# Altium PCB digital.PcbDoc (part 1 of 3)
Units mm, origin at the board's own origin, x right, y up, seen from the top; angles counter-clockwise.
Board outline 25.2 x 25.2 mm, 4 copper layers (Top Layer, Inner Layer 1, Inner Layer 2, Bottom Layer), stack 1.51 mm thick; 75 components, 68 nets, 309 pads, 118 vias.
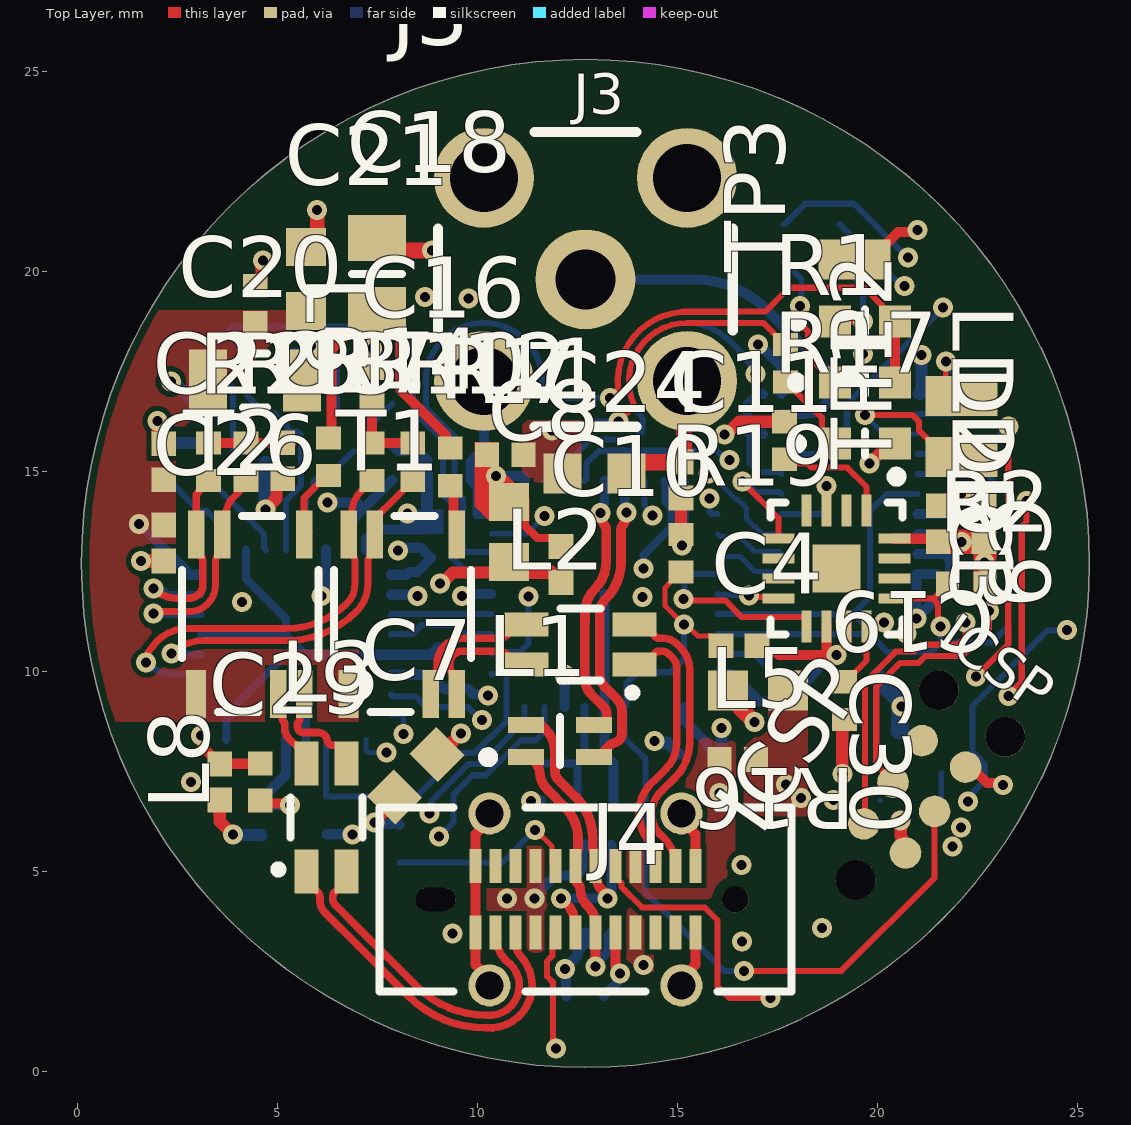
[diagram p0: Top Layer view]
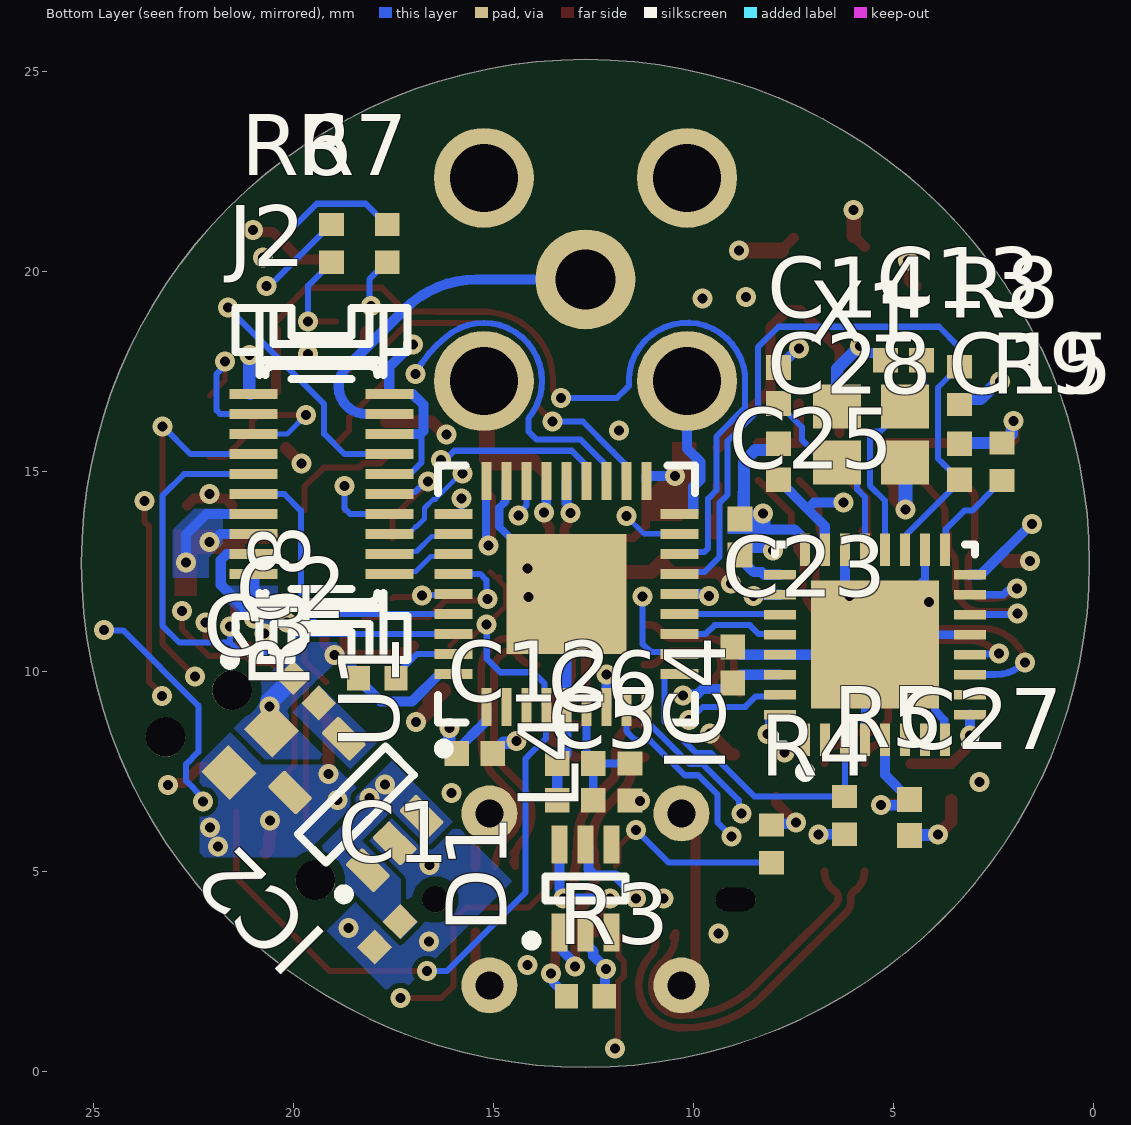
[diagram p1: Bottom Layer view, seen from below]
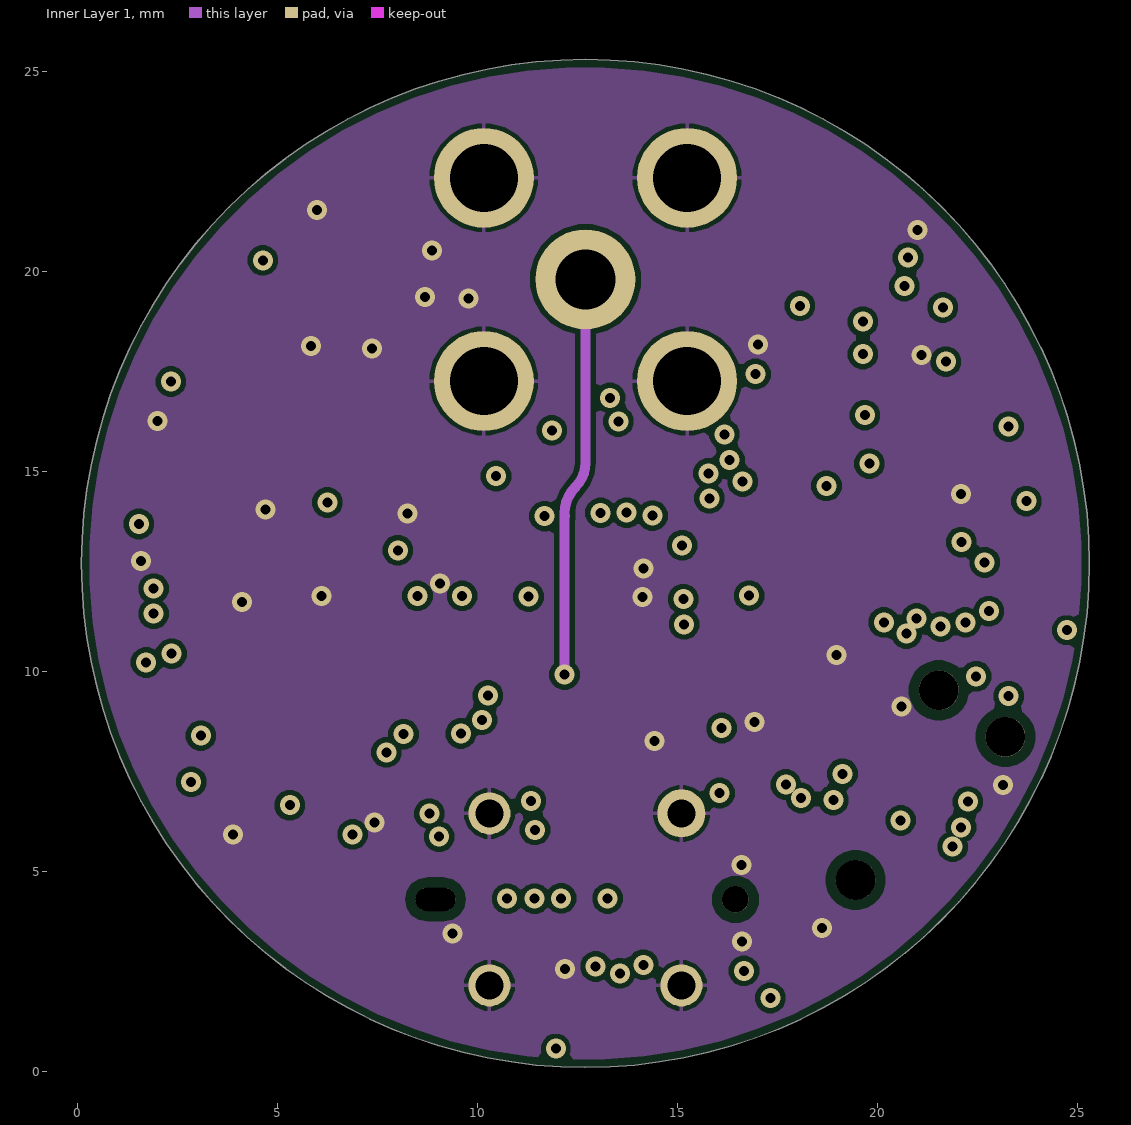
[diagram p2: Inner Layer 1]
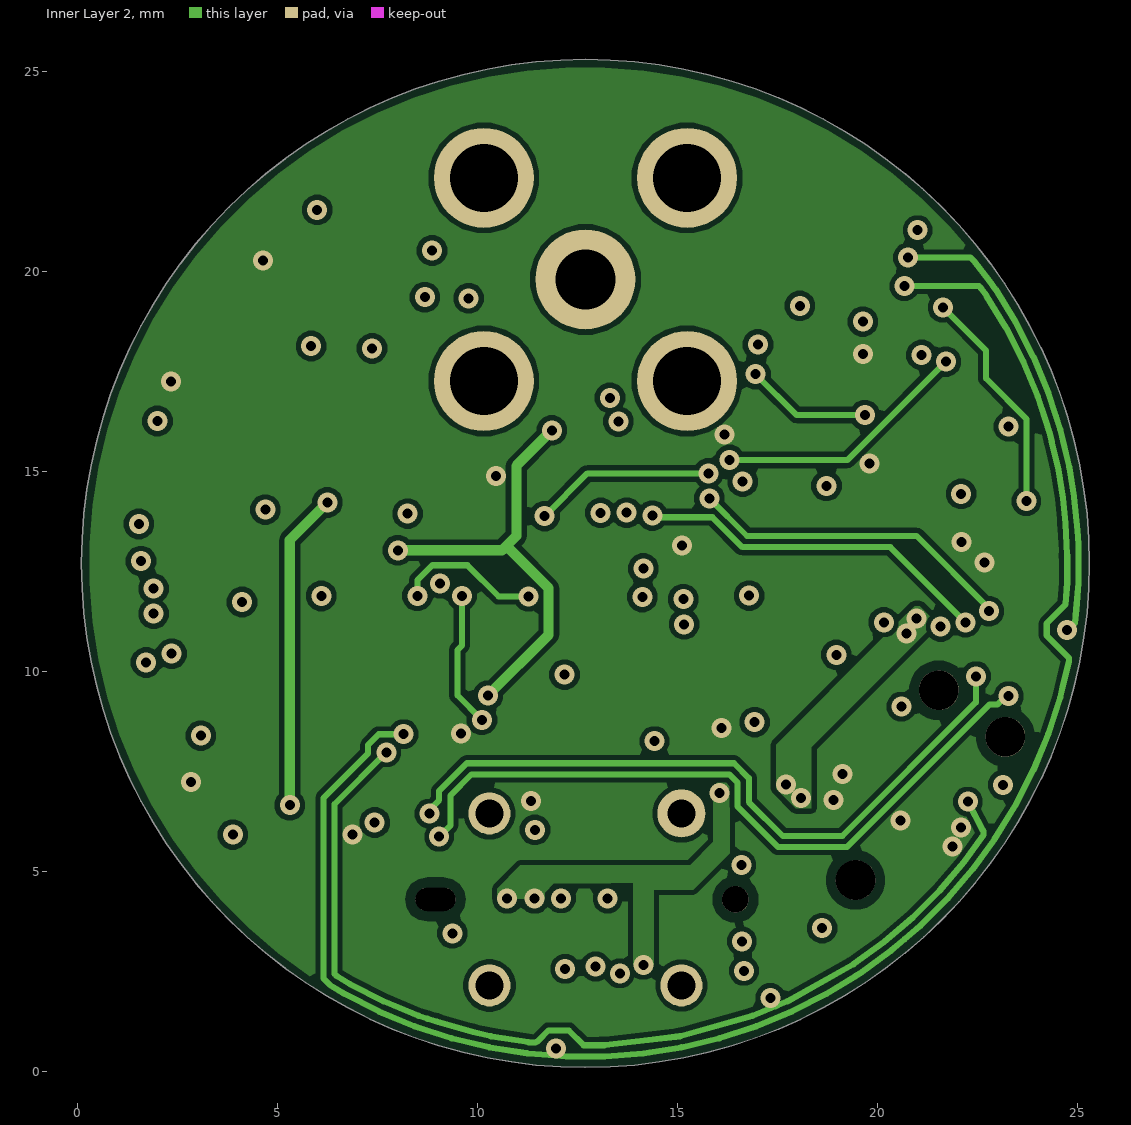
[diagram p3: Inner Layer 2]
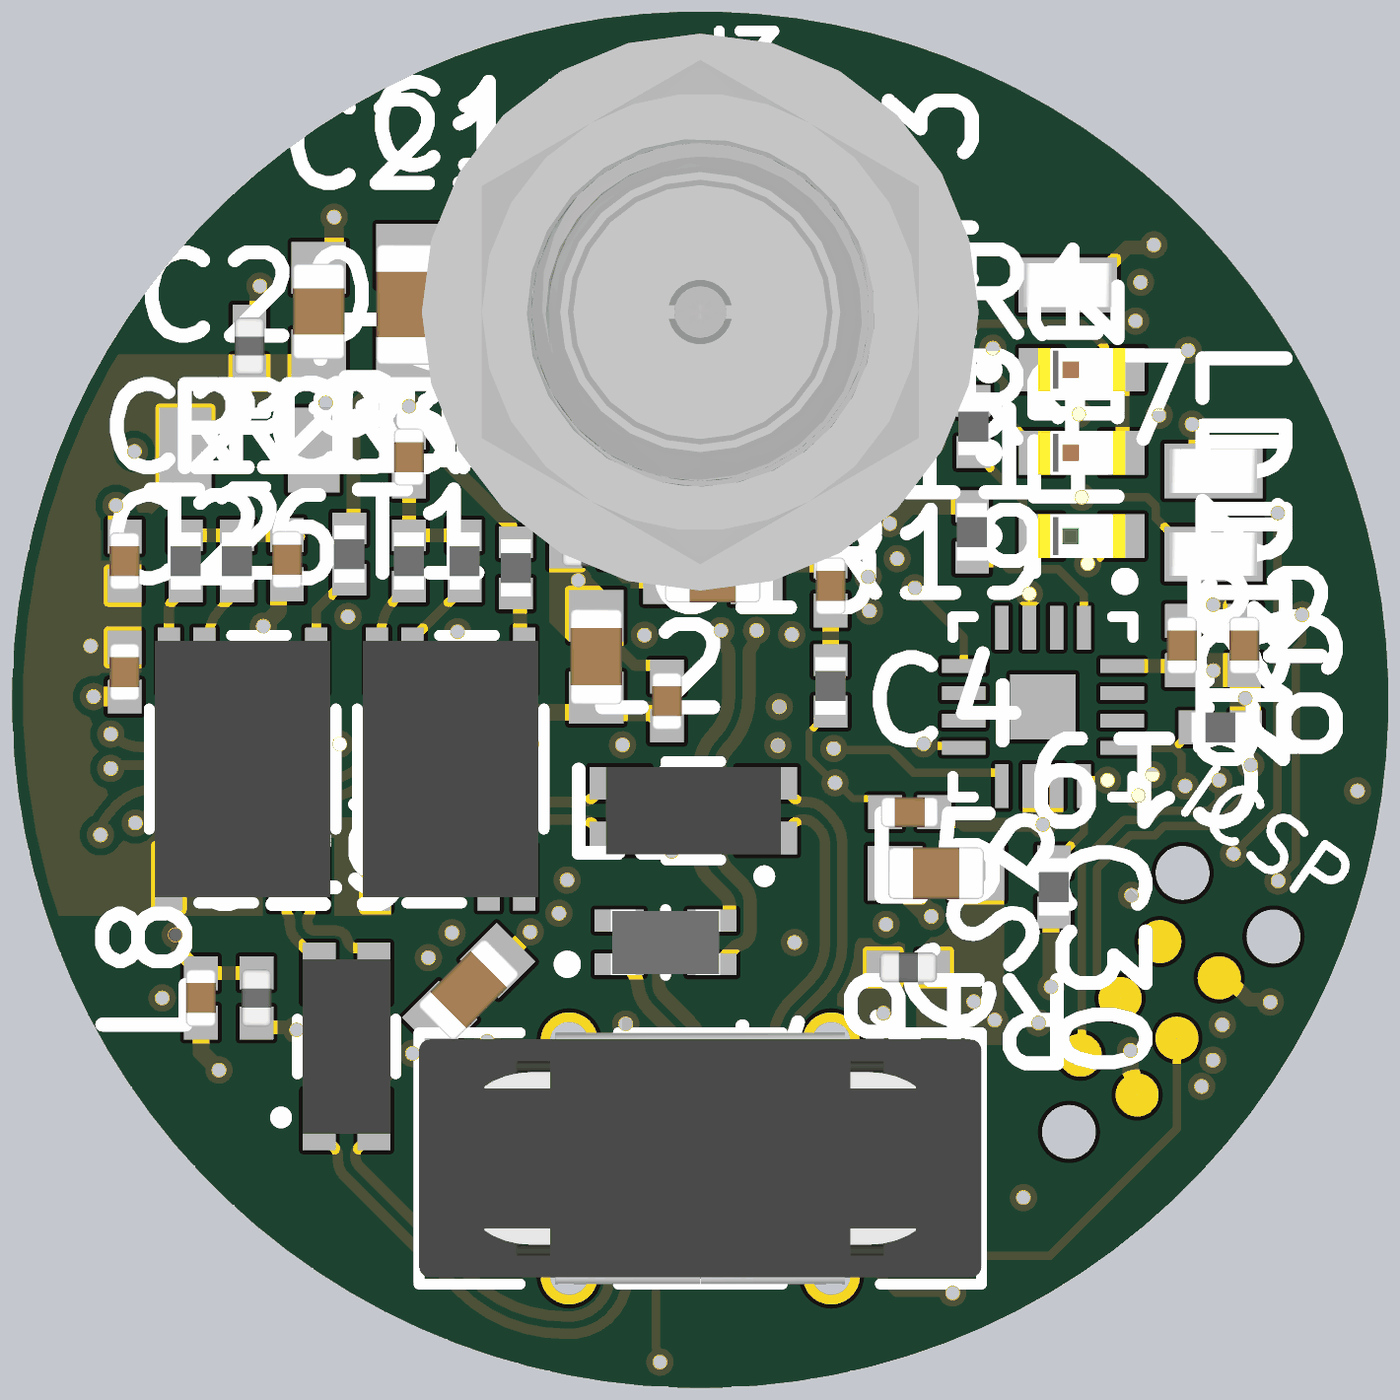
[diagram p5: 3D render of the assembled board from above, using the file's embedded part models]
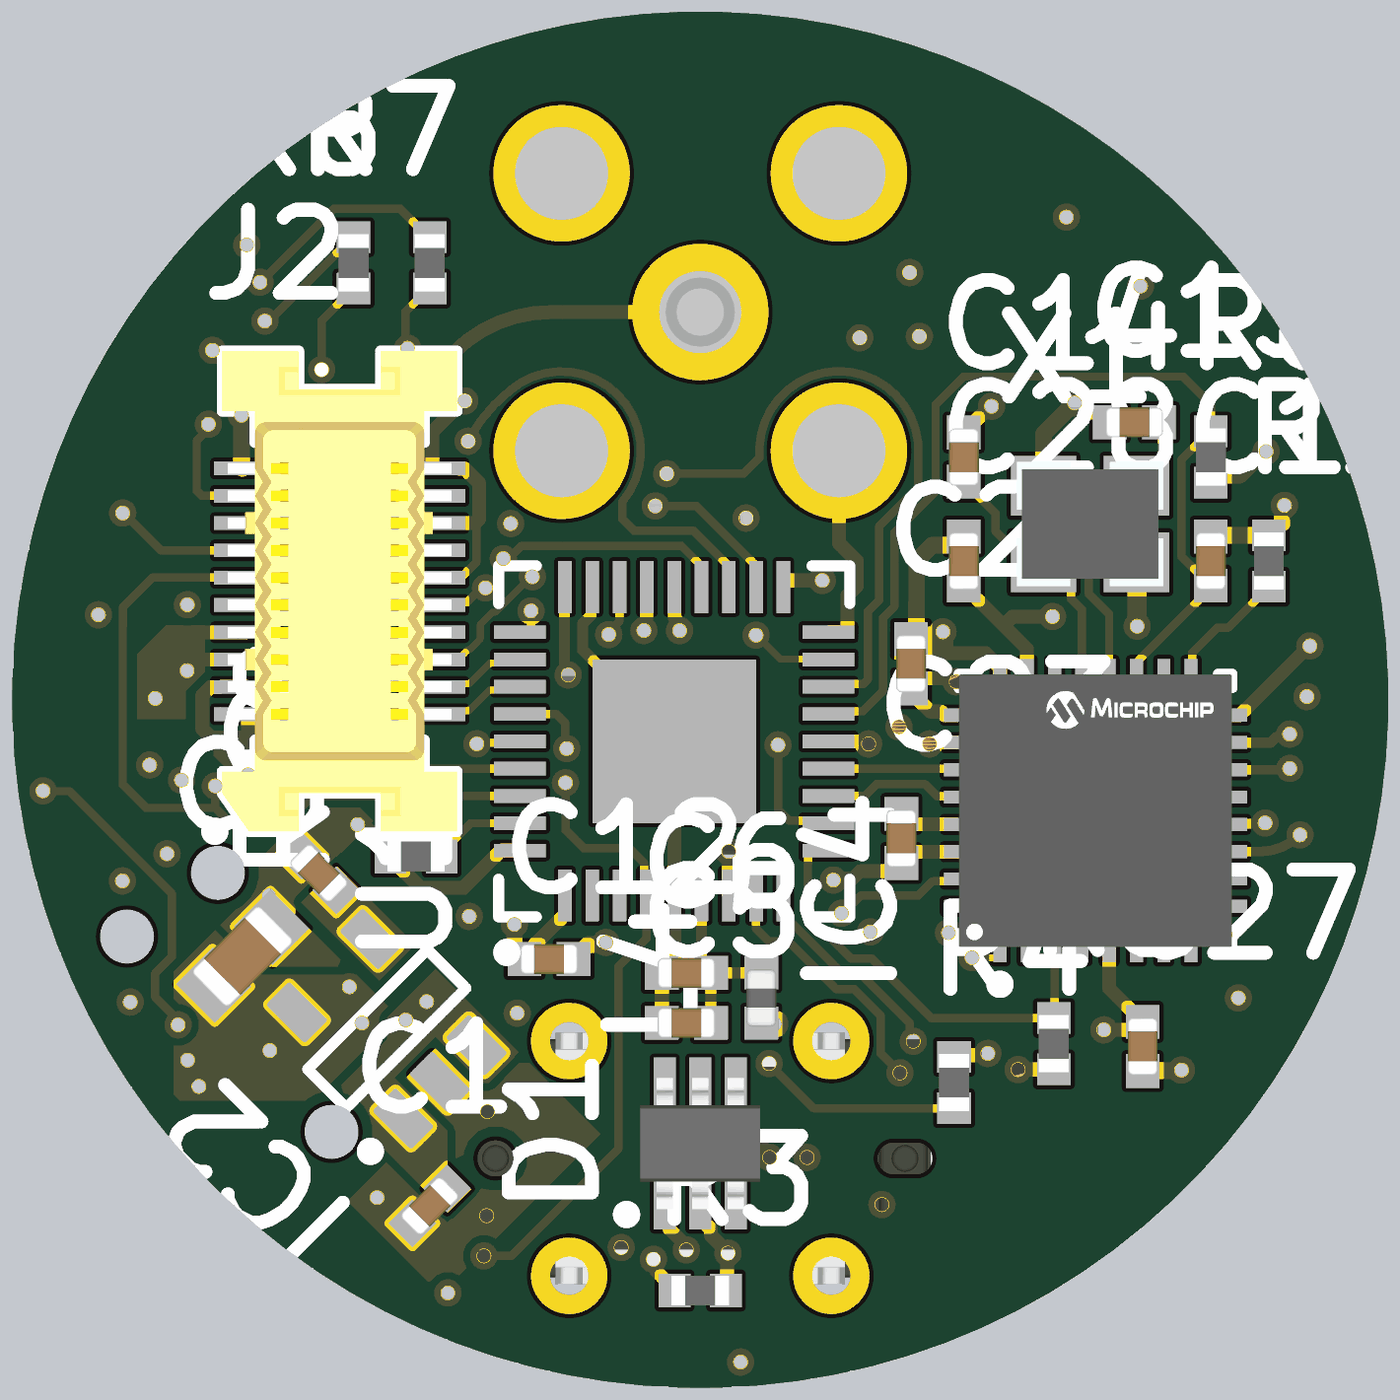
[diagram p6: 3D render of the assembled board from below, using the file's embedded part models]

## Layer stack, top to bottom
Top Solder: solder mask 0.0102, Solder Resist, Dk 3.5
Top Layer: signal copper 0.035
Dielectric 1: prepreg 0.22, PP-006, Dk 4.1
Inner Layer 1: signal copper 0.035
Dielectric 2: dielectric 0.93, FR-4, Dk 4.8
Inner Layer 2: signal copper 0.035
Dielectric 3: prepreg 0.22, PP-006, Dk 4.1
Bottom Layer: signal copper 0.035
Bottom Solder: solder mask 0.0102, Solder Resist, Dk 3.5

## Board outline
12.7,0.1 cw(c12.7,12.7) 0.1,12.7 cw(c12.7,12.7) 12.7,25.3 cw(c12.7,12.7) 25.3,12.7 cw(c12.7,12.7)

## Design rules (kind name [scope] priority, off if disabled: settings)
BoardOutlineClearance [All] p1: gap=0.2 ignorepadtopadclearanceinfootprint=FALSE
Clearance Clearance_ViaInPad [IsPad vs IsVia] p1: gap=0 ignorepadtopadclearanceinfootprint=FALSE except(0.01: SMDPad-Via)
Clearance [All] p2: gap=0.127 ignorepadtopadclearanceinfootprint=FALSE except(0.25: Arc-Hole Track-Hole SMDPad-Hole THPad-Hole Via-Hole Fill-Hole Poly-Hole Region-Hole Text-Hole)
ComponentClearance [All] p1: gap=0.102 collisioncheckmode=3 verticalgap=0.102 showdistances=TRUE
DiffPairsRouting "Schematic Differential Pairs Routing" [InNet('ETHP_RX_P')] p1: maxlimit=0.127 minlimit=0.127 mostfreqgap=0.127 toplayer_minwidth=0.191 toplayer_maxwidth=0.191 toplayer_prefwidth=0.191 midlayer1_minwidth=0.191 midlayer1_maxwidth=0.191 midlayer1_prefwidth=0.191 midlayer2_minwidth=0.191 midlayer2_maxwidth=0.191 midlayer2_prefwidth=0.191 bottomlayer_minwidth=0.191 bottomlayer_maxwidth=0.191 bottomlayer_prefwidth=0.191 maxuncoupledlength=1.778
DiffPairsRouting "Schematic Differential Pairs Routing_2" [InNet('ETHP_TX_N')] p2: maxlimit=0.127 minlimit=0.127 mostfreqgap=0.127 toplayer_minwidth=0.191 toplayer_maxwidth=0.191 toplayer_prefwidth=0.191 midlayer1_minwidth=0.191 midlayer1_maxwidth=0.191 midlayer1_prefwidth=0.191 midlayer2_minwidth=0.191 midlayer2_maxwidth=0.191 midlayer2_prefwidth=0.191 bottomlayer_minwidth=0.191 bottomlayer_maxwidth=0.191 bottomlayer_prefwidth=0.191 maxuncoupledlength=1.778
DiffPairsRouting "Schematic Differential Pairs Routing_45" [InNet('ETH_LED0')] p3: maxlimit=0.152 minlimit=0.127 mostfreqgap=0.127 toplayer_minwidth=0.241 toplayer_maxwidth=0.241 toplayer_prefwidth=0.241 midlayer1_minwidth=0.241 midlayer1_maxwidth=0.241 midlayer1_prefwidth=0.241 midlayer2_minwidth=0.241 midlayer2_maxwidth=0.241 midlayer2_prefwidth=0.241 bottomlayer_minwidth=0.241 bottomlayer_maxwidth=0.241 bottomlayer_prefwidth=0.241 maxuncoupledlength=2.54
DiffPairsRouting "Schematic Differential Pairs Routing_44" [InNet('USBJ_D_N')] p4: maxlimit=0.152 minlimit=0.127 mostfreqgap=0.127 toplayer_minwidth=0.241 toplayer_maxwidth=0.241 toplayer_prefwidth=0.241 midlayer1_minwidth=0.241 midlayer1_maxwidth=0.241 midlayer1_prefwidth=0.241 midlayer2_minwidth=0.241 midlayer2_maxwidth=0.241 midlayer2_prefwidth=0.241 bottomlayer_minwidth=0.241 bottomlayer_maxwidth=0.241 bottomlayer_prefwidth=0.241 maxuncoupledlength=2.54
DiffPairsRouting "Schematic Differential Pairs Routing_43" [InNet('USBJ_D_P')] p5: maxlimit=0.152 minlimit=0.127 mostfreqgap=0.127 toplayer_minwidth=0.241 toplayer_maxwidth=0.241 toplayer_prefwidth=0.241 midlayer1_minwidth=0.241 midlayer1_maxwidth=0.241 midlayer1_prefwidth=0.241 midlayer2_minwidth=0.241 midlayer2_maxwidth=0.241 midlayer2_prefwidth=0.241 bottomlayer_minwidth=0.241 bottomlayer_maxwidth=0.241 bottomlayer_prefwidth=0.241 maxuncoupledlength=2.54
DiffPairsRouting "Schematic Differential Pairs Routing_42" [InNet('ETHJ.RX_P')] p6: maxlimit=0.127 minlimit=0.127 mostfreqgap=0.127 toplayer_minwidth=0.191 toplayer_maxwidth=0.191 toplayer_prefwidth=0.191 midlayer1_minwidth=0.191 midlayer1_maxwidth=0.191 midlayer1_prefwidth=0.191 midlayer2_minwidth=0.191 midlayer2_maxwidth=0.191 midlayer2_prefwidth=0.191 bottomlayer_minwidth=0.191 bottomlayer_maxwidth=0.191 bottomlayer_prefwidth=0.191 maxuncoupledlength=1.778
DiffPairsRouting "Schematic Differential Pairs Routing_41" [InNet('ETHJ.RX_N')] p7: maxlimit=0.127 minlimit=0.127 mostfreqgap=0.127 toplayer_minwidth=0.191 toplayer_maxwidth=0.191 toplayer_prefwidth=0.191 midlayer1_minwidth=0.191 midlayer1_maxwidth=0.191 midlayer1_prefwidth=0.191 midlayer2_minwidth=0.191 midlayer2_maxwidth=0.191 midlayer2_prefwidth=0.191 bottomlayer_minwidth=0.191 bottomlayer_maxwidth=0.191 bottomlayer_prefwidth=0.191 maxuncoupledlength=1.778
DiffPairsRouting "Schematic Differential Pairs Routing_40" [InNet('NetC17_2')] p8: maxlimit=0.127 minlimit=0.127 mostfreqgap=0.127 toplayer_minwidth=0.191 toplayer_maxwidth=0.191 toplayer_prefwidth=0.191 midlayer1_minwidth=0.191 midlayer1_maxwidth=0.191 midlayer1_prefwidth=0.191 midlayer2_minwidth=0.191 midlayer2_maxwidth=0.191 midlayer2_prefwidth=0.191 bottomlayer_minwidth=0.191 bottomlayer_maxwidth=0.191 bottomlayer_prefwidth=0.191 maxuncoupledlength=1.778
DiffPairsRouting "Schematic Differential Pairs Routing_39" [InNet('NetC16_2')] p9: maxlimit=0.127 minlimit=0.127 mostfreqgap=0.127 toplayer_minwidth=0.191 toplayer_maxwidth=0.191 toplayer_prefwidth=0.191 midlayer1_minwidth=0.191 midlayer1_maxwidth=0.191 midlayer1_prefwidth=0.191 midlayer2_minwidth=0.191 midlayer2_maxwidth=0.191 midlayer2_prefwidth=0.191 bottomlayer_minwidth=0.191 bottomlayer_maxwidth=0.191 bottomlayer_prefwidth=0.191 maxuncoupledlength=1.778
DiffPairsRouting "Schematic Differential Pairs Routing_38" [InNet('NetR14_1')] p10: maxlimit=0.127 minlimit=0.127 mostfreqgap=0.127 toplayer_minwidth=0.191 toplayer_maxwidth=0.191 toplayer_prefwidth=0.191 midlayer1_minwidth=0.191 midlayer1_maxwidth=0.191 midlayer1_prefwidth=0.191 midlayer2_minwidth=0.191 midlayer2_maxwidth=0.191 midlayer2_prefwidth=0.191 bottomlayer_minwidth=0.191 bottomlayer_maxwidth=0.191 bottomlayer_prefwidth=0.191 maxuncoupledlength=1.778
DiffPairsRouting "Schematic Differential Pairs Routing_37" [InNet('NetR11_1')] p11: maxlimit=0.127 minlimit=0.127 mostfreqgap=0.127 toplayer_minwidth=0.191 toplayer_maxwidth=0.191 toplayer_prefwidth=0.191 midlayer1_minwidth=0.191 midlayer1_maxwidth=0.191 midlayer1_prefwidth=0.191 midlayer2_minwidth=0.191 midlayer2_maxwidth=0.191 midlayer2_prefwidth=0.191 bottomlayer_minwidth=0.191 bottomlayer_maxwidth=0.191 bottomlayer_prefwidth=0.191 maxuncoupledlength=1.778
DiffPairsRouting "Schematic Differential Pairs Routing_36" [InNet('ETHT_RX_N')] p12: maxlimit=0.127 minlimit=0.127 mostfreqgap=0.127 toplayer_minwidth=0.191 toplayer_maxwidth=0.191 toplayer_prefwidth=0.191 midlayer1_minwidth=0.191 midlayer1_maxwidth=0.191 midlayer1_prefwidth=0.191 midlayer2_minwidth=0.191 midlayer2_maxwidth=0.191 midlayer2_prefwidth=0.191 bottomlayer_minwidth=0.191 bottomlayer_maxwidth=0.191 bottomlayer_prefwidth=0.191 maxuncoupledlength=1.778
DiffPairsRouting "Schematic Differential Pairs Routing_35" [InNet('ETHT_TX_N')] p13: maxlimit=0.127 minlimit=0.127 mostfreqgap=0.127 toplayer_minwidth=0.191 toplayer_maxwidth=0.191 toplayer_prefwidth=0.191 midlayer1_minwidth=0.191 midlayer1_maxwidth=0.191 midlayer1_prefwidth=0.191 midlayer2_minwidth=0.191 midlayer2_maxwidth=0.191 midlayer2_prefwidth=0.191 bottomlayer_minwidth=0.191 bottomlayer_maxwidth=0.191 bottomlayer_prefwidth=0.191 maxuncoupledlength=1.778
DiffPairsRouting "Schematic Differential Pairs Routing_34" [InNet('ETHT_RX_P')] p14: maxlimit=0.127 minlimit=0.127 mostfreqgap=0.127 toplayer_minwidth=0.191 toplayer_maxwidth=0.191 toplayer_prefwidth=0.191 midlayer1_minwidth=0.191 midlayer1_maxwidth=0.191 midlayer1_prefwidth=0.191 midlayer2_minwidth=0.191 midlayer2_maxwidth=0.191 midlayer2_prefwidth=0.191 bottomlayer_minwidth=0.191 bottomlayer_maxwidth=0.191 bottomlayer_prefwidth=0.191 maxuncoupledlength=1.778
DiffPairsRouting "Schematic Differential Pairs Routing_33" [InNet('ETHT_TX_P')] p15: maxlimit=0.127 minlimit=0.127 mostfreqgap=0.127 toplayer_minwidth=0.191 toplayer_maxwidth=0.191 toplayer_prefwidth=0.191 midlayer1_minwidth=0.191 midlayer1_maxwidth=0.191 midlayer1_prefwidth=0.191 midlayer2_minwidth=0.191 midlayer2_maxwidth=0.191 midlayer2_prefwidth=0.191 bottomlayer_minwidth=0.191 bottomlayer_maxwidth=0.191 bottomlayer_prefwidth=0.191 maxuncoupledlength=1.778
DiffPairsRouting "Schematic Differential Pairs Routing_32" [InNet('GND')] p16: maxlimit=0.127 minlimit=0.127 mostfreqgap=0.127 toplayer_minwidth=0.191 toplayer_maxwidth=0.191 toplayer_prefwidth=0.191 midlayer1_minwidth=0.191 midlayer1_maxwidth=0.191 midlayer1_prefwidth=0.191 midlayer2_minwidth=0.191 midlayer2_maxwidth=0.191 midlayer2_prefwidth=0.191 bottomlayer_minwidth=0.191 bottomlayer_maxwidth=0.191 bottomlayer_prefwidth=0.191 maxuncoupledlength=1.778
DiffPairsRouting "Schematic Differential Pairs Routing_31" [InNet('PPA3V3')] p17: maxlimit=0.127 minlimit=0.127 mostfreqgap=0.127 toplayer_minwidth=0.191 toplayer_maxwidth=0.191 toplayer_prefwidth=0.191 midlayer1_minwidth=0.191 midlayer1_maxwidth=0.191 midlayer1_prefwidth=0.191 midlayer2_minwidth=0.191 midlayer2_maxwidth=0.191 midlayer2_prefwidth=0.191 bottomlayer_minwidth=0.191 bottomlayer_maxwidth=0.191 bottomlayer_prefwidth=0.191 maxuncoupledlength=1.778
DiffPairsRouting "Schematic Differential Pairs Routing_30" [InNet('ETHJ.TX_P')] p18: maxlimit=0.127 minlimit=0.127 mostfreqgap=0.127 toplayer_minwidth=0.191 toplayer_maxwidth=0.191 toplayer_prefwidth=0.191 midlayer1_minwidth=0.191 midlayer1_maxwidth=0.191 midlayer1_prefwidth=0.191 midlayer2_minwidth=0.191 midlayer2_maxwidth=0.191 midlayer2_prefwidth=0.191 bottomlayer_minwidth=0.191 bottomlayer_maxwidth=0.191 bottomlayer_prefwidth=0.191 maxuncoupledlength=1.778
DiffPairsRouting "Schematic Differential Pairs Routing_29" [InNet('ETHJ.TX_N')] p19: maxlimit=0.127 minlimit=0.127 mostfreqgap=0.127 toplayer_minwidth=0.191 toplayer_maxwidth=0.191 toplayer_prefwidth=0.191 midlayer1_minwidth=0.191 midlayer1_maxwidth=0.191 midlayer1_prefwidth=0.191 midlayer2_minwidth=0.191 midlayer2_maxwidth=0.191 midlayer2_prefwidth=0.191 bottomlayer_minwidth=0.191 bottomlayer_maxwidth=0.191 bottomlayer_prefwidth=0.191 maxuncoupledlength=1.778
DiffPairsRouting "Schematic Differential Pairs Routing_26" [InNet('NetU1_31')] p20: maxlimit=0.152 minlimit=0.152 mostfreqgap=0.152 toplayer_minwidth=0.229 toplayer_maxwidth=0.229 toplayer_prefwidth=0.229 midlayer1_minwidth=0.229 midlayer1_maxwidth=0.229 midlayer1_prefwidth=0.229 midlayer2_minwidth=0.229 midlayer2_maxwidth=0.229 midlayer2_prefwidth=0.229 bottomlayer_minwidth=0.229 bottomlayer_maxwidth=0.229 bottomlayer_prefwidth=0.229 maxuncoupledlength=2.54
DiffPairsRouting "Schematic Differential Pairs Routing_19" [InNet('USBM_D_N')] p21: maxlimit=0.152 minlimit=0.127 mostfreqgap=0.127 toplayer_minwidth=0.241 toplayer_maxwidth=0.241 toplayer_prefwidth=0.241 midlayer1_minwidth=0.241 midlayer1_maxwidth=0.241 midlayer1_prefwidth=0.241 midlayer2_minwidth=0.241 midlayer2_maxwidth=0.241 midlayer2_prefwidth=0.241 bottomlayer_minwidth=0.241 bottomlayer_maxwidth=0.241 bottomlayer_prefwidth=0.241 maxuncoupledlength=2.54
DiffPairsRouting "Schematic Differential Pairs Routing_17" [InNet('ETHP_TX_P')] p22: maxlimit=0.152 minlimit=0.152 mostfreqgap=0.152 toplayer_minwidth=0.175 toplayer_maxwidth=0.175 toplayer_prefwidth=0.175 midlayer1_minwidth=0.175 midlayer1_maxwidth=0.175 midlayer1_prefwidth=0.175 midlayer2_minwidth=0.175 midlayer2_maxwidth=0.175 midlayer2_prefwidth=0.175 bottomlayer_minwidth=0.175 bottomlayer_maxwidth=0.175 bottomlayer_prefwidth=0.175 maxuncoupledlength=2.54
DiffPairsRouting "Schematic Differential Pairs Routing_16" [InNet('ETHP_RX_P')] p23: maxlimit=0.152 minlimit=0.152 mostfreqgap=0.152 toplayer_minwidth=0.175 toplayer_maxwidth=0.175 toplayer_prefwidth=0.175 midlayer1_minwidth=0.175 midlayer1_maxwidth=0.175 midlayer1_prefwidth=0.175 midlayer2_minwidth=0.175 midlayer2_maxwidth=0.175 midlayer2_prefwidth=0.175 bottomlayer_minwidth=0.175 bottomlayer_maxwidth=0.175 bottomlayer_prefwidth=0.175 maxuncoupledlength=2.54
DiffPairsRouting [All] p24: maxlimit=0.102 minlimit=0.102 mostfreqgap=0.102 toplayer_minwidth=0.102 toplayer_maxwidth=1816.048 toplayer_prefwidth=0.102 midlayer1_minwidth=0.102 midlayer1_maxwidth=1816.048 midlayer1_prefwidth=0.102 midlayer2_minwidth=0.102 midlayer2_maxwidth=1816.048 midlayer2_prefwidth=0.102 bottomlayer_minwidth=0.102 bottomlayer_maxwidth=1816.048 bottomlayer_prefwidth=0.102 maxuncoupledlength=12.7
Height [All] p1: minheight=0 maxheight=1816.048 prefheight=12.7
HoleSize [All] p1: absolutevalues=TRUE maxlimit=6.3 minlimit=0.2 maxpercent=80.000 minpercent=20.000
HoleToHoleClearance [All] p1: gap=0.25 allowstackedmicrovias=FALSE
MinimumAnnularRing [All] p1: minimumring=0.076
MinimumSolderMaskSliver [All] p1: minsoldermaskwidth=0
PlaneClearance [All] p1: clearance=0.102
PlaneConnect PlaneConnectPowerPads [InPadClass('PowerPads')] p1: planeconnectstyle=Direct reliefexpansion=0.508 reliefentries=4 reliefconductorwidth=0.254 reliefairgap=0.254
PlaneConnect [All] p2: pad.planeconnectstyle=Relief pad.reliefexpansion=0.3 pad.reliefentries=4 pad.reliefconductorwidth=0.102 pad.reliefairgap=0.102 via.planeconnectstyle=Direct via.reliefexpansion=0.3 via.reliefentries=4 via.reliefconductorwidth=0.127 via.reliefairgap=0.127
PolygonConnect PolygonConnectPowerPads [All vs (InPadClass('PowerPads'))] p1: connectstyle=Direct reliefconductorwidth=0.254 reliefentries=4 polygonreliefangle="90 Angle" airgapwidth=0.254
PolygonConnect [All] p2: thpad.connectstyle=Relief thpad.reliefconductorwidth=0.102 thpad.reliefentries=4 thpad.polygonreliefangle="90 Angle" thpad.airgapwidth=0.102 smdpad.connectstyle=Direct smdpad.reliefconductorwidth=0.102 smdpad.reliefentries=4 smdpad.polygonreliefangle="90 Angle" smdpad.airgapwidth=0.102 via.connectstyle=Direct via.reliefconductorwidth=0.127 via.reliefentries=4 via.polygonreliefangle="90 Angle" via.airgapwidth=0.127
RoutingVias [All] p1: holewidth=0.25 width=0.5 viastyle="Through Hole" minholewidth=0.25 minwidth=0.5 maxholewidth=6.3 maxwidth=6.55
SilkToSilkClearance [All] p1: silktosilkclearance=0
SilkToSolderMaskClearance [IsPad] p1: minsilkscreentomaskgap=0.102 clearancetoexposedcopper=TRUE
SolderMaskExpansion [IsVia] p1: expansion=0.075 istentingtop=TRUE
SolderMaskExpansion SolderMaskExpansion_Via [All] p2: expansion=0.075 istentingtop=FALSE
Width [All] p1: maxlimit=1816.048 minlimit=0.127 preferedwidth=0.127
20 further rules are at their usual default settings.

## Classes and differential pairs
component class "B2B Connector": J2
component class "MCU and IO": C1 C2 C3 C4 C5 C6 C7 C8 C9 C10 C12 C19 C30 D1 IC2 IC3 ICSP J3 J4 L1 L4 L5 LD1 R1 R2 R3 R4 R16 R17 R18 R19 TP1 TP2 TP3 U1
component class "Ethernet Controller and Magnetics": C13 C14 C15 C16 C17 C18 C20 C21 C22 C23 C24 C25 C26 C27 C28 C29 IC4 L2 L3 L6 L7 L8 LD2 LD3 R5 R6 R7 R8 R9 R10 R11 R12 R13 R14 R15 T1 T2 X1
differential pair ETHJ.TX: +ETHJ.TX_P -ETHJ.TX_N
differential pair ETHJ.RX: +ETHJ.RX_P -ETHJ.RX_N
differential pair USBM_D: +USBM_D_P -USBM_D_N
differential pair USBJ_D: +USBJ_D_P -USBJ_D_N
differential pair ETHT_TX: +ETHT_TX_P -ETHT_TX_N
differential pair ETHT_RX: +ETHT_RX_P -ETHT_RX_N
differential pair ETHP_TX: +ETHP_TX_P -ETHP_TX_N
differential pair ETHP_RX: +ETHP_RX_P -ETHP_RX_N

## Components (designator, comment, footprint, x,y, rotation, side; value= is the part's Value field where it differs from the comment)
C1 "100nF" CAPC1005X55N 17.653,3.429 r135 bottom
C2 "10nF" CAPC1005X55N 19.685,9.525 r225 bottom
C3 "4.7uF" CAPC1709X95N 21.082,8.001 r315 bottom
C4 "100nF" CAPC1005X55N 16.535,10.643 r180 top
C5 "1uF" CAPC1005X55N 12.954,6.782 r180 bottom
C6 "10nF" CAPC1005X55N 12.954,7.696 r180 bottom
C7 "4.7uF" CAPC1709X95N 8.458,7.391 r45 top
C8 "4.7uF" CAPC1709X95N 10.795,13.487 r90 top
C9 "10nF" CAPC1005X55N 21.52,13.694 r270 top
C10 "100nF" CAPC1005X55N 12.09,12.675 r90 top
C11 "100nF" CAPC1005X55N 15.088,14.783 r270 top
C12 "100nF" CAPC1005X55N 15.469,7.95 r0 bottom
C13 "22pF" CAPC1005X55N 4.75,17.78 r0 bottom
C14 "22pF" CAPC1005X55N 7.874,17.145 r270 bottom
C15 "100nF" CAPC1005X55N 3.35,15.24 r270 bottom
C16 "100nF" CAPC1005X55N 7.366,17.145 r270 top
C17 "100nF" CAPC1005X55N 5.131,15.265 r90 top
C18 "2.2nF" CAPC2013X100N 7.493,19.939 r270 top
C19 "100nF" CAPC1005X55N 22.663,13.694 r270 top
C20 "10u" CAPC2013X145X20ML20 4.445,17.272 r180 top
C21 "2.2uF" CAPC1608X87N 5.715,19.812 r270 top
C22 "100nF" CAPC1005X55N 2.159,15.24 r270 top
C23 "100nF" CAPC1005X55N 9.017,10.16 r270 bottom
C24 "2.2uF" CAPC1608X87N 12.929,14.954 r180 top
C25 "100nF" CAPC1005X55N 8.839,13.36 r270 bottom
C26 "10nF" CAPC1005X55N 2.159,13.208 r90 top
C27 "100nF" CAPC1005X55N 4.597,6.35 r90 bottom
C28 "100nF" CAPC1005X55N 7.874,15.24 r270 bottom
C29 "100nF" CAPC1005X55N 3.556,7.239 r90 top
C30 "10uF" CAPC1608X80N 17.018,9.525 r0 top
D1 "DRTR5V0U4S-7" SOT65P210X110-6N 12.7,4.572 r90 bottom
IC2 "TPS79933QDDCRQ1" DDC0005A_N 18.44,6.674 r45 bottom
IC3 "MCP47CMB02-E/MG" QFN127P600-8N 18.976,12.569 r270 top
IC4 "KSZ8851SNLI-TR" FP-QFN55-32LD-PL-5-IPC_C 5.461,10.668 r90 bottom
ICSP "TC2030-IDC-NL" TC2030-IDC-NL 19.452,4.785 r55 top
J2 "SlimStack™" MOLEX_53748-0208 19.304,14.686 r90 bottom locked
J3 "132291" SMA_132291 12.7,19.8 r0 top locked
J4 "USB 3.1 Type C Receptacle" 632722110112 12.7,4.3 r180 top locked
L1 "90R@100MHz" IND_MURATA_DLW21S 12.065,8.255 r0 top
L2 "600Ohm" WE-CNSW_1206 12.573,10.668 r180 top
L3 "600Ohm" WE-CNSW_1206 6.223,6.35 r90 top
L4 "600R@100MHz" INDC1005X55N 11.582,7.239 r90 bottom
L5 "600R@100MHz" INDC1005X55N 16.51,7.798 r0 top
L6 "600R@100MHz" INDC1005X55N 4.445,19.177 r270 top
L7 "600R@100MHz" INDC1005X55N 10.693,15.418 r0 top
L8 "600R@100MHz" INDC1005X55N 4.572,7.239 r90 top
LD1 "Green" LED_LITEON_LTST-C193KGKT-5A 19.685,15.697 r0 top
LD2 "Red" LED_LITEON_LTST-C193KRKT-5A 19.685,18.745 r0 top
LD3 "Red" LED_LITEON_LTST-C193KRKT-5A 19.685,17.221 r0 top
R1 "49R9" RESC1005X40N 17.704,17.704 r270 top
R2 "4k7" RESC1005X40N 22.225,12.192 r0 top
R3 "5k1" RESC1005X40N 12.7,1.88 r0 bottom
R4 "5k1" RESC1005X40N 8.052,5.69 r90 bottom
R5 "4k7" RESC1005X40N 6.223,6.401 r270 bottom
R6 "140" RESC1005X40N 19.05,20.701 r270 bottom
R7 "140" RESC1005X40N 17.653,20.701 r270 bottom
R8 "4k7" RESC1005X40N 3.35,17.145 r270 bottom
R9 "3k" RESC1005X40N 2.286,15.24 r270 bottom
R10 "49R9" RESC1005X35N 7.366,15.24 r270 top
R11 "75" RESC1005X40N 9.322,15.113 r90 top
R12 "49R9" RESC1005X35N 8.382,15.24 r270 top
R13 "49R9" RESC1005X35N 4.216,15.24 r270 top
R14 "75" RESC1005X40N 6.274,15.367 r90 top
R15 "49R9" RESC1005X35N 3.277,15.24 r270 top
R16 "4k7" RESC1005X40N 19.177,9.271 r270 top
R17 "100k" RESC1005X40N 17.678,15.773 r90 top
R18 "100k" RESC1005X40N 17.907,9.83 r0 bottom
R19 "100k" RESC1005X40N 15.088,12.954 r90 top
T1 "74930000" 74930000 8.128,11.43 r270 top
T2 "74930000" 74930000 4.318,11.43 r270 top
TP1 "S2761-46R" S2761-46R 22.098,15.367 r180 top
TP2 "S2761-46R" S2761-46R 22.098,16.891 r180 top
TP3 "S2761-46R" S2761-46R 19.431,20.295 r180 top
U1 "STM32F103T8U6" STM-VFQFPN36_L 13.177,11.938 r90 bottom
X1 "25MHz" FA20H160000MF12ZAC3 5.562,15.918 r180 bottom

## Footprints (in the part's own frame and the unit in brackets; to place one, negate y for a bottom-side part, rotate by r counter-clockwise, add the part's x,y. Pads: shape width x height; smd on the part's side, far side on the other; paste and mask are expansions set on the pad)
74930000 [mm] "Super Tiny Signal Transformer, body 4.7x3.22mm"
  rect 1.2x0.41 smd: 1(-1.99,-1.35) 2(-1.99,-0.7) 3(-1.99,1.35) 4(-1.99,1.35) 6(1.99,0.7) 7(1.99,1.35)
  rect 1.2x0.5 smd: 5(1.99,-1.35)
  silkscreen extent -2.45,-1.71 2.45,1.71, body extent -2.35,-1.61 2.35,1.61, height 2.83
632722110112 [mm] "USB_Type C 3.1_Vertical_SMT_1,0mm"
  rect 0.3x0.85 smd: A1(-2.75,0.83) A2(-2.25,0.83) A3(-1.75,0.83) A4(-1.25,0.83) A5(-0.75,0.83) A6(-0.25,0.83) A7(0.25,0.83) A8(0.75,0.83) A9(1.25,0.83) A10(1.75,0.83) A11(2.25,0.83) A12(2.75,0.83) B1(2.75,-0.83) B2(2.25,-0.83) B3(1.75,-0.83) B4(1.25,-0.83) B5(0.75,-0.83) B6(0.25,-0.83) B7(-0.25,-0.83) B8(-0.75,-0.83) B9(-1.25,-0.83) B10(-1.75,-0.83) B11(-2.25,-0.83) B12(-2.75,-0.83)
  round 0.66 hole 0.66 unplated: MH1(-3.75,0)
  oval 1x0.58 hole 0.58 slot 1 at 0 deg unplated: MH2(3.75,0)
  round 1.05 / inner round 1.05 / far side round 1.4 hole 0.7: Shell(-2.4,2.15) Shell(2.4,2.15) Shell(2.4,-2.15)
  round 1.05 / inner round 1.2 / far side round 1.4 hole 0.7: Shell(-2.4,-2.15)
  silkscreen extent -5.15,-2.3 5.15,2.3, body extent -5.15,-2.3 5.15,2.3, height 7.95
CAPC1005X55N [mm] "Capacitor, Non-Polarized, Chip; 1.00mm L X 0.50mm W X 0.70mm H, IPC Medium Density"
  rect 0.62x0.62 smd: 1(-0.45,0) 2(0.45,0)
  body extent -0.52,-0.27 0.53,0.28, height 0.55
CAPC1608X80N [mm] "Chip Capacitor, Body 1.6x0.8mm IPC Medium Density"
  rect 1x1 smd: 1(-0.75,0) 2(0.75,0)
  body extent -0.87,-0.47 0.88,0.48, height 0.8
CAPC1608X87N [mm] "Chip Capacitor, Body 1.6x0.8mm IPC Medium Density"
  rect 0.95x1 smd: 1(-0.8,0) 2(0.8,0)
  body extent -0.87,-0.47 0.88,0.48, height 0.87
CAPC1709X95N [mm] "Capacitor, non-Polarized, Chip; 1.65mm L X 0.85mm W X 0.95mm H,IPC Medium Density"
  rect 0.95x1 smd: 1(-0.75,0) 2(0.75,0)
  body extent -0.87,-0.47 0.88,0.48, height 0.95
CAPC2013X100N [mm] "Capacitor, Non-Polarized, Chip; 2.00mm L X 1.25mm W X 0.9mm H, IPC Medium Density"
  rect 1.15x1.45 smd: 1(-0.9,0) 2(0.9,0)
  silkscreen extent 0,-0.62 0,0.62, body extent -1.1,-0.72 1.1,0.73, height 1
CAPC2013X145X20ML20 [mm] "Chip Capacitor, 2-Leads, Body 2.20x1.45mm, IPC Low Density"
  rect 0.95x1.55 smd: 1(-1.175,0) 2(1.175,0)
  silkscreen extent -0.3,-0.67 0.3,0.67, body extent -1.1,-0.72 1.1,0.72, height 1.45
DDC0005A_N [mm] "SOT23, 5-Leads, Body 3.05x1.75mm, Pitch 0.95mm, IPC Medium Density"
  rrect17% 1x0.6 smd: 1(-1.375,0.95) 2(-1.375,0) 3(-1.375,-0.95) 4(1.375,-0.95) 5(1.375,0.95)
  silkscreen extent -1.5,-1.55 0.5,1.92, body extent -0.88,-1.52 0.88,1.53, height 1.1
FA20H160000MF12ZAC3 [mm]
  rect 1.2x1.1 smd: 1(-0.85,-0.7) 2(0.85,-0.7) 3(0.85,0.7) 4(-0.85,0.7)
  body extent -1.34,-1.14 1.34,1.14, height 0.65
FP-QFN55-32LD-PL-5-IPC_C [mm]
  rect 0.808x0.239 smd paste+0: 1(-2.375,1.75) 2(-2.375,1.25) 3(-2.375,0.75) 4(-2.375,0.25) 5(-2.375,-0.25) 6(-2.375,-0.75) 7(-2.375,-1.25) 8(-2.375,-1.75) 17(2.375,-1.75) 18(2.375,-1.25) 19(2.375,-0.75) 20(2.375,-0.25) 21(2.375,0.25) 22(2.375,0.75) 23(2.375,1.25) 24(2.375,1.75)
  rect 0.239x0.808 smd paste+0: 9(-1.75,-2.375) 10(-1.25,-2.375) 11(-0.75,-2.375) 12(-0.25,-2.375) 13(0.25,-2.375) 14(0.75,-2.375) 15(1.25,-2.375) 16(1.75,-2.375) 25(1.75,2.375) 26(1.25,2.375) 27(0.75,2.375) 28(0.25,2.375) 29(-0.25,2.375) 30(-0.75,2.375) 31(-1.25,2.375) 32(-1.75,2.375)
  rect 3.2x3.2 smd paste-1000: 33(0,0)
  silkscreen extent -3.3,-2.5 2.5,2.5, body extent -2.5,-2.5 2.5,2.5, height 1
IND_MURATA_DLW21S [mm] "Common Mode Choke Coil, DLW21S Series - Body 2 x 1.2mm"
  rect 0.9x0.4 smd: 1(-0.85,-0.4) 2(0.85,-0.4) 3(0.85,0.4) 4(-0.85,0.4)
  silkscreen extent -1.92,-0.6 0,0.6, body extent -1,-0.6 1,0.6, height 1.4
INDC1005X55N [mm] "Chip Inductor, 2-Leads, EIA 0402, Metric 1005, Body 1x0.5mm, 0402IPC Medium Density"
  rect 0.6x0.62 smd: 1(-0.46,0) 2(0.46,0)
  body extent -0.52,-0.27 0.53,0.28, height 0.55
LED_LITEON_LTST-C193KGKT-5A [mm] "SMD AlInGaP Green LED, Lens Water Clear, 2-Leads, Body 1.6x0.8mm"
  rect 0.8x0.8 smd: 1(-0.75,0) 2(0.75,0)
  silkscreen extent -1.82,-0.3 0,0.3, body extent -0.8,-0.4 0.8,0.4, height 0.35
LED_LITEON_LTST-C193KRKT-5A [mm] "SMD AlInGaP Red LED, Lens Water Clear, 2-Leads, Body 1.6x0.8mm"
  rect 0.8x0.8 smd: 1(-0.75,0) 2(0.75,0)
  silkscreen extent -1.82,-0.3 0,0.3, body extent -0.8,-0.4 0.8,0.4, height 0.35
MOLEX_53748-0208 [mm] "0.50mm Pitch SlimStack Dual Row 20 Circuits Surface Mount Vertical Plug (3.00mm Stacking Heights)"
  rect 0.25x1.2 smd: 1(-2.25,1.7) 2(-2.25,-1.7) 3(-1.75,1.7) 4(-1.75,-1.7) 5(-1.25,1.7) 6(-1.25,-1.7) 7(-0.75,1.7) 8(-0.75,-1.7) 9(-0.25,1.7) 10(-0.25,-1.7) 11(0.25,1.7) 12(0.25,-1.7) 13(0.75,1.7) 14(0.75,-1.7) 15(1.25,1.7) 16(1.25,-1.7) 17(1.75,1.7) 18(1.75,-1.7) 19(2.25,1.7) 20(2.25,-1.7)
  silkscreen extent -4.52,-2.15 4.4,2.41, body extent -4.4,-2.15 4.4,2.15, height 2.42
QFN127P600-8N [mm]
  rect 0.8x0.25 smd: 1(-1.45,0.75) 2(-1.45,0.25) 3(-1.45,-0.25) 4(-1.45,-0.75) 9(1.45,-0.75) 10(1.45,-0.25) 11(1.45,0.25) 12(1.45,0.75)
  rect 0.25x0.8 smd: 5(-0.75,-1.45) 6(-0.25,-1.45) 7(0.25,-1.45) 8(0.75,-1.45) 13(0.75,1.45) 14(0.25,1.45) 15(-0.25,1.45) 16(-0.75,1.45)
  rect 1.2x1.2 smd: 17(0,0)
  silkscreen extent -2.42,-1.65 1.65,1.65, body extent -1.5,-1.5 1.5,1.5, height 0.9
RESC1005X35N [mm] "Chip Resistor, EIA 0402, Metric 1005, Body 1.0x0.5mm, IPC Medium Density"
  rect 0.58x0.62 smd: 1(-0.47,0) 2(0.47,0)
  body extent -0.52,-0.27 0.53,0.28, height 0.35
RESC1005X40N [mm] "Chip Resistor, EIA 0402, Metric 1005, Body 1.0x0.5mm, IPC Medium Density"
  rect 0.58x0.62 smd: 1(-0.47,0) 2(0.47,0)
  body extent -0.52,-0.27 0.53,0.28, height 0.4
S2761-46R [mm]
  rect 1.8x1 smd: 1(0,0)
  body extent -0.8,-0.4 0.8,0.4, height 1.17
SMA_132291 [mm]
  round 2.5 hole 1.5: H(0,0)
  round 2.5 hole 1.7: SH1(2.54,2.54) SH2(2.54,-2.54) SH3(-2.54,-2.54) SH4(-2.54,2.54)
  silkscreen extent -3.68,-3.68 3.68,3.68, body extent -5.1,-5.1 5.1,5.1, height 17.65
SOT65P210X110-6N [mm]
  rect 0.95x0.4 smd: 1(-1.1,0.65) 2(-1.1,0) 3(-1.1,-0.65) 4(1.1,-0.65) 5(1.1,0) 6(1.1,0.65)
  silkscreen extent -1.42,-1 0.3,1.48, body extent -1.2,-1.1 1.2,1.1, height 1.1
STM-VFQFPN36_L [mm] "QFN, 36-Leads, Body 6.13x6.13mm, Pitch 0.5mm, Thermal Pad 3x3mm, IPC High Density"
  rect 0.95x0.25 smd: 1(-2.825,2) 2(-2.825,1.5) 3(-2.825,1) 4(-2.825,0.5) 5(-2.825,0) 6(-2.825,-0.5) 7(-2.825,-1) 8(-2.825,-1.5) 9(-2.825,-2) 19(2.825,-2) 20(2.825,-1.5) 21(2.825,-1) 22(2.825,-0.5) 23(2.825,0) 24(2.825,0.5) 25(2.825,1) 26(2.825,1.5) 27(2.825,2)
  rect 0.25x0.95 smd: 10(-2,-2.825) 11(-1.5,-2.825) 12(-1,-2.825) 13(-0.5,-2.825) 14(0,-2.825) 15(0.5,-2.825) 16(1,-2.825) 17(1.5,-2.825) 18(2,-2.825) 28(2,2.825) 29(1.5,2.825) 30(1,2.825) 31(0.5,2.825) 32(0,2.825) 33(-0.5,2.825) 34(-1,2.825) 35(-1.5,2.825) 36(-2,2.825)
  rect 3x3 smd: 37(0,0)
  silkscreen extent -3.99,-3.21 3.21,3.21, body extent -3.07,-3.07 3.07,3.07, height 1
TC2030-IDC-NL [mm] "Tag-Connect 6-Pin with No Legs (PN# TC2030-IDC-NL)"
  round 0.991 hole 0.991 unplated: 0(0,0) 0(5.08,-1.016) 0(5.08,1.016)
  round 0.79 smd paste-0.39: 1(1.27,-0.635) 2(1.27,0.635) 3(2.54,-0.635) 4(2.54,0.635) 5(3.89,-0.635) 6(3.81,0.635)
WE-CNSW_1206 [mm] "SMT Common Mode Line Filter, 4-leads, body 3.2x1.6mm"
  rect 1.1x0.6 smd: 1(-1.35,0.5) 2(1.35,0.5) 3(1.35,-0.5) 4(-1.35,-0.5)
  silkscreen extent -1.4,-0.9 0.5,1.3, body extent -1.6,-0.8 1.6,0.8, height 1.79

## Part data
C1 C4 C10 C11 C12 C15 C16 C17 C19 C22 C23 C25 C27 C28 C29: library part CC0402_100NF_16V_10%_X7R, "Non-polarised capacitor", Case=0402, Manufacturer=GENERIC, Manufacturer1 ComponentHeight=0.55mm, Manufacturer1 Example=MURATA, Manufacturer1 Part Number=GRM155R71C104KA88D, Tolerance=±10%, Voltage=16V, Author="CERN DEM JLC", Component Type=Standard, CreateDate=05.12.2013, HelpURL=\\cern.ch\dfs\Applications\Altium\Datasheets\CC0402_X7R_MURATA_GRM.pdf, LatestRevisionDate=03.12.2007, Manufacturer Part Number=CC0402_100NF_16V_10%_X7R, Mounted=Yes, Part Description="SMD Multilayer Chip Ceramic Capacitor", Part Number=CC0402_100NF_16V_10%_X7R, Pin Count=2, Sense=No, SMD=Yes, Socket=No, Status="Not Recommended", TC=X7R
C2 C6 C9 C26: library part CC0402_10NF_16V_10%_X7R, "Non-polarised capacitor", Case=0402, Manufacturer=GENERIC, Manufacturer1 ComponentHeight=0.55mm, Manufacturer1 Example=PHYCOMP, Manufacturer1 Part Number=223878715636, Tolerance=±10%, Voltage=16V, Author="CERN DEM JLC", Component Type=Standard, CreateDate=03.12.2007, HelpURL=\\cern.ch\dfs\Applications\Altium\Datasheets\CC0402_X7R_PHYCOMP.pdf, LatestRevisionDate=03.12.2007, Manufacturer Part Number=CC0402_10NF_16V_10%_X7R, Mounted=Yes, Part Description="SMD Multilayer Chip Ceramic Capacitor", Part Number=CC0402_10NF_16V_10%_X7R, Pin Count=2, Sense=No, SMD=Yes, Socket=No, Status="Not Recommended", TC=X7R
C3 C7 C8: library part CC0603_4.7UF_16V_10%_X5R, "Non-polarised capacitor", Case=0603, Manufacturer=GENERIC, Manufacturer1 ComponentHeight=0.95mm, Manufacturer1 Example="TAIYO YUDEN", Manufacturer1 Part Number=EMK107ABJ475KA-T, Tolerance=±10%, Voltage=16V, Author="CERN DEM JLC", Component Type=Standard, CreateDate=16.12.2013, HelpURL=\\cern.ch\dfs\Applications\Altium\Datasheets\CC0603_X7R_TAIYO-YUDEN_HIGH-VALUE.pdf, LatestRevisionDate=16.09.2014, Manufacturer Part Number=CC0603_4.7UF_16V_10%_X5R, Mounted=Yes, Part Description="SMD Multilayer Chip Ceramic Capacitor", Part Number=CC0603_4.7UF_16V_10%_X5R, Pin Count=2, Sense=No, SMD=Yes, Socket=No, Status=None, TC=X5R
C5: library part CC0402_1UF_16V_10%_X5R, "Non-polarised capacitor", Case=0402, Manufacturer=GENERIC, Manufacturer1 ComponentHeight=0.55mm, Manufacturer1 Example=TDK, Manufacturer1 Part Number=C1005X5R1C105KT, Tolerance=±10%, Voltage=16V, Author="CERN DEM JLC", Component Type=Standard, CreateDate=25.10.2012, HelpURL=\\cern.ch\dfs\Applications\Altium\Datasheets\CC0402_X5R_TDK_C.pdf, LatestRevisionDate=25.10.2012, Manufacturer Part Number=CC0402_1UF_16V_10%_X5R, Mounted=Yes, Part Description="SMD Multilayer Chip Ceramic Capacitor", Part Number=CC0402_1UF_16V_10%_X5R, Pin Count=2, Sense=No, SMD=Yes, Socket=No, Status=Preferred, TC=X5R
C13 C14: library part CC0402_22PF_50V_5%_C0G, "Non-polarised capacitor", Case=0402, Manufacturer=GENERIC, Manufacturer1 ComponentHeight=0.55mm, Manufacturer1 Example=KEMET, Manufacturer1 Part Number=C0402C220J5GACTU, Tolerance=±5%, Voltage=50V, Author="CERN DEM JLC", Component Type=Standard, CreateDate=03.12.2007, HelpURL="\\cern.ch\dfs\Applications\Altium\Datasheets\CC0402_C0G_KEMET_(Commercial Grade).pdf", LatestRevisionDate=03.12.2007, Manufacturer Part Number=CC0402_22PF_50V_5%_C0G, Mounted=Yes, Part Description="SMD Multilayer Chip Ceramic Capacitor", Part Number=CC0402_22PF_50V_5%_C0G, Pin Count=2, Sense=No, SMD=Yes, Socket=No, Status=Preferred, TC=C0G/NP0
C18: library part CC0805_2.2NF_100V_10%_X7R_YUDEN_HMJ212KB7222KDHT, "Non-polarised capacitor", Case=0805, Manufacturer="TAIYO YUDEN", Manufacturer Part Number=HMJ212KB7222KDHT, Tolerance=±10%, Voltage=100V, Author="CERN DEM JLC", Component Type=Standard, ComponentHeight=1mm, CreateDate=23.01.2018, HelpURL=\\cern.ch\dfs\Applications\Altium\Datasheets\CC0805_TAIYO-YUDEN_HMJ212KB7222KDHT.pdf, LatestRevisionDate=23.01.2018, Mounted=Yes, Part Description="SMD Multilayer Chip Ceramic Capacitor for Automotive / Industrial Applications", Part Number=CC0805_2.2NF_100V_10%_X7R_YUDEN_HMJ212KB7222KDHT, Pin Count=2, Sense=No, SMD=Yes, Socket=No, Status="Not Recommended", TC=X7R
C20: library part CMP-2000-05452-1, "Multilayer Ceramic Chip Capacitor, 10 uF, +/- 10%, 10 V, -55 to 125 degC, 0805 (2012 Metric), RoHS, Tape and Reel", Capacitance=10µF, Manufacturer=TDK, Operating Temperature=-55degC~125degC, Package / Case=0805(2012Metric), Package Description="2-Pin Surface Mount Device, Body 2 x 1.25 mm", Package Reference=805, PCN Part Number=MLCCPartNumberChange30/Nov/2012, Ratings=-, Standard Package=1, Temperature Coefficient=X7R, Tolerance=±10%, Voltage - Rated=10V, Applications=GeneralPurpose, Category=Capacitors, Datasheet URL=http://download.siliconexpert.com/pdfs/2015/4/21/15/54/45/779/tdk_/manual/37024850441143360mlcc_commercial_general_en.pdf, Datasheet Version=Mar-15, Family=CeramicCapacitors, Features=-, Height - Seated (Max)=-, Lead Spacing=-, Lead Style=-, Manufacturer URL=http://www.tdk.com/, Mounting Type=SurfaceMount,MLCC, Online Catalog=CSeries,GeneralPurpose, Other Names=445-6857-6, Packaging=Digi-Reel, Product Training Modules=CSeriesGeneralApplicationsSEAT,CCV,andTVCLDesignToolsGuidetoReplacinganElectrolyticCapacitorwithanMLCC, RoHS Information=RoHSCertificate-MLCC, Series=C, Size / Dimension="0.079\"Lx0.049\"W(2.00mmx1.25mm)", Thickness (Max)="0.057\"(1.45mm)"
C21 C24: library part CC0603_2.2UF_16V_10%_X5R, "Non-polarised capacitor", Case=0603, Manufacturer=GENERIC, Manufacturer1 ComponentHeight=0.9mm, Manufacturer1 Example="YAGEO PHYCOMP", Manufacturer1 Part Number=CC0603KRX5R7BB225, Tolerance=±10%, Voltage=16V, Author="CERN DEM JLC", Component Type=Standard, CreateDate=28.04.2011, HelpURL=\\cern.ch\dfs\Applications\Altium\Datasheets\CC0805_X5R_PHYCOMP_HC.pdf, LatestRevisionDate=28.04.2011, Manufacturer Part Number=CC0603_2.2UF_16V_10%_X5R, Mounted=Yes, Part Description="SMD Multilayer Chip Ceramic Capacitor", Part Number=CC0603_2.2UF_16V_10%_X5R, Pin Count=2, Sense=No, SMD=Yes, Socket=No, Status=Preferred, TC=X5R
C30: library part CC0603_10UF_10V_10%_X5R, "Non-polarised capacitor", Case=0603, Manufacturer=GENERIC, Manufacturer1 ComponentHeight=0.8mm, Manufacturer1 Example=MURATA, Manufacturer1 Part Number=GRM188R61A106KE69D, Tolerance=±10%, Voltage=10V, Author="CERN DEM JLC", Component Type=Standard, CreateDate=31.01.2017, HelpURL=\\cern.ch\dfs\Applications\Altium\Datasheets\CC0603_MURATA_GRM188R61A106KE69D.pdf, LatestRevisionDate=31.01.2017, Manufacturer Part Number=CC0603_10UF_10V_10%_X5R, Mounted=Yes, Part Description="SMD Multilayer Chip Ceramic Capacitor", Part Number=CC0603_10UF_10V_10%_X5R, Pin Count=2, Sense=No, SMD=Yes, Socket=No, Status=None, TC=X5R
D1: "Integrated Quad Ultra-Low Capacitance ESD Protection", Case=SOT363, Manufacturer=DIODES, Author=GK, Bonding=No, Component Type=Standard, ComponentHeight=1.1mm, CreateDate=24.01.2017, Device=DRTR5V0U4S-7, HelpURL=\\cern.ch\dfs\Applications\Altium\Datasheets\PRTR5V0U4Y.pdf, LatestRevisionDate=14.09.2020, Manufacturer Part Number=DRTR5V0U4S-7, Mounted=Yes, PackageDescription="SOT363, SC70-6, 0.65mm Pitch; 6 Pin, 1.25mm W X 2.00mm L X 1.10mm H body, IPC Medium Density", Part Description="Integrated Quad Ultra-Low Capacitance ESD (±8kV) Protection", Part Number=DRTR5V0U4S-7, Pin Count=6, PressFit=No, Sense=No, SMD=Yes, Socket=No, Status=Active, Status Comment=Active
IC2: library part CMP-0394-01087-2, "Single Output High PSRR LDO, 200 mA, Fixed 3.3 V Output, 2.7 to 6.5 V Input, with Low IQ, 5-pin SOT (DDC), -40 to 125 degC, Green (RoHS & no Sb/Br)", Manufacturer="Texas Instruments", Rating=Automotive, Accuracy(%)=2, Code_JEDEC=MO-193, ComponentLink1Description="Manufacturer URL", ComponentLink1URL=http://www.ti.com/, ComponentLink2Description=Datasheet, ComponentLink2URL=http://www.ti.com/general/docs/lit/getliterature.tsp?genericPartNumber=TPS79933-Q1&fileType=pdf, ComponentLink3Description="Package Specification", ComponentLink3URL=http://www.ti.com/litv/pdf/mpds123d, ComponentLink4Description="URL Link1", ComponentLink4URL="Samples URL:http://www.ti.com/product/tps79933-q1#samples", DatasheetVersion=SBVS097E, Eco-Plan="Green (RoHS & no Sb/Br)", Fixed Output Options(V)=3.3, Iout(Max)(A)=0.2, Iq(Typ)(mA)=0.04, Mounting Technology="Surface Mount", PackageDescription="5-Pin Plastic Small Outline, Body 2.9 x 1.6 mm, 0.95 mm Pitch", PackageReference=DDC0005A, PackageVersion=4204403-2/E, PartNumber=TPS79933QDDCRQ1, SubFamily="Single Channel LDO", Vdo(Typ)(mV)=90, Vin(Max)(V)=6.5, Vin(Min)(V)=2.7, Vout Adj(Max)(V)=3.3, Vout Adj(Min)(V)=3.3
IC3: "DAC 2-CH Resistor-String 8-bit 16-Pin QFN EP Tube", Manufacturer=Microchip, Supplier Part Number 1=MCP47CMB02-E/MG-ND, Category="Digital to Analog Converters (DACs)", ComponentLink1Description=http://www.microchip.com/mymicrochip/filehandler.aspx?ddocname=en607627&src-supplier=Digi-Key, ComponentLink1URL=http://www.microchip.com/mymicrochip/filehandler.aspx?ddocname=en607627&src-supplier=Digi-Key, Manufacturer Part Number=MCP47CMB02-E/MG, Pricing 1="1=1,66000, 25=1,38880, 100=1,29000 (USD)", RoHS=No, Stock 1=452, Supplier 1=Digi-Key
IC4: library part KSZ8851SNLI, "IC ETHERNET CTLR 1PORT PCI 32MLF", Case/Package=QFN, Max Operating Temperature=85°C, Max Supply Current=85mA, Max Supply Voltage=3.5V, Min Operating Temperature=-40°C, Min Supply Voltage=3.1V, Nominal Supply Current=75mA, Operating Supply Voltage=3.3V, Package Quantity=1000, Data Rate=100Mbps, Height=0.85mm, Interface=SPI, Lead Free="Lead Free", Length=5mm, Mount="Surface Mount", Number of Functions=1, Number of Pins=32, Number of Ports=1, Number of Transceivers=1, Packaging="Tape and Reel", Radiation Hardening=No, REACH SVHC="No SVHC", Series=-, Supply Current=75mA, Supply Voltage-Nom=3.3V, Width=5mm
ICSP: "Tag-Connect 6-Pin with No Legs"
J2: library part MOLEX_53748-0208, "Connector 20 Male", Manufacturer=MOLEX, Manufacturer Part Number=53748-0208, Author="CERN DEM BC", Component Type=Standard, ComponentHeight=2.4mm, CreateDate=10.12.2019, Family=SlimStack™, HelpURL=\\cern.ch\dfs\Applications\Altium\Datasheets\MOLEX_53748-0208.pdf, LatestRevisionDate=10.12.2019, Mounted=Yes, Part Description="0.50mm Pitch SlimStack™ Dual Row 20 Circuits Surface Mount Vertical Plug (3.00 Stacking Heights)", Part Number=MOLEX_53748-0208, Pin Count=20, PressFit=No, Sense=No, SMD=Yes, Socket=No, Status=None
J3: "CONN SMA JACK STR 50 OHM PCB", Case/Package=SMA, Dielectric Material=PTFE, Frequency=18GHz, Housing Color=Gold, Manufacturer="Amphenol Connex", Max Operating Temperature=165°C, Min Operating Temperature=-65°C, Operating Frequency="0 to 18Hz", Package Quantity=1, Supplier Part Number 1=ACX1976-ND, Body Material=Brass, Body Plating=Gold, Category="RF / Coaxial Connectors", Center Contact Plating=Gold, ComponentLink1Description=https://datasheet.ciiva.com/5177/132291-80119-5177682.pdf?src-supplier=Mouser, ComponentLink1URL=https://datasheet.ciiva.com/5177/132291-80119-5177682.pdf?src-supplier=Mouser, ComponentLink2Description=https://datasheet.ciiva.com/23749/132291-customer-drawing-23749316.pdf?src-supplier=Newark, ComponentLink2URL=https://datasheet.ciiva.com/23749/132291-customer-drawing-23749316.pdf?src-supplier=Newark, ComponentLink3Description=https://datasheet.ciiva.com/646/132291-646926.pdf?src-supplier=Digi-Key, ComponentLink3URL=https://datasheet.ciiva.com/646/132291-646926.pdf?src-supplier=Digi-Key, Connector Type=SMA, Contact Material=Copper, Contact Plating=Gold, Fastening Type=Threaded, Impedance=50R, Insulation Material=Polytetrafluoroethylene, Manufacturer Part Number=132291, Mating Cycles=500, Max Frequency=18GHz, Mount="Bulkhead,Through Hole,Panel", Orientation=Straight, Packaging=Bulk, Pricing 1="1=5,72000, 10=5,49200, 25=5,03440, 50=4,80560, 100=4,57680, 250=4,00468, 500=3,89024, 1000=3,31815, 2500=3,08931 (USD)", Radiation Hardening=No, RoHS=Yes, RoHS Compliant=Yes, Series=-, Stock 1=13762, Supplier 1=Digi-Key, Termination=Solder, Weight=0.173901oz
J4: library part 632722110112, "USB 3.1 Type C, Receptacle, Vertical, SMT", Manufacturer="Wurth Elektronik", Operating Temperature="-40 to +85degC", Rated Current=5A, Working Voltage=20VAC, Application="USB 3.1", ComponentLink1Description=Manufacturer, ComponentLink1URL=http://www.we-online.de, ComponentLink2Description=Datasheet, ComponentLink2URL=https://katalog.we-online.com/em/datasheet/632722110112.pdf, Gender=Receptacle, Interface Type="Type C", Manufacturer Part Number=632722110112, Mounting Technology=SMT, Packaging="Tape and Reel", Pin Number=24, Published Date="August 2020", Type=Vertical
L1: library part IND_MURATA_DLW21SN900SQ2L, "Inductor Common Mode", Case=0805, Manufacturer=MURATA, Manufacturer Part Number=DLW21SN900SQ2L, Power=330mA, Resistance=0.35R, Tolerance=±25%, Author="CERN DEM JLC", Component Type=Standard, ComponentHeight=1.4mm, CreateDate=01.07.2014, HelpURL=\\cern.ch\dfs\Applications\Altium\Datasheets\IND_MURATA_DLW21S.pdf, LatestRevisionDate=01.07.2014, Mounted=Yes, Part Description="Wire Wound Common Mode Choke Coil (DLW21S Series)", Part Number=IND_MURATA_DLW21SN900SQ2L, Pin Count=4, Sense=No, SMD=Yes, Socket=No, Status=None
L2 L3: library part 744232601, "WE-CNSW SMT Common Mode Line Filter, size 1206, 600Ohm, 0.26A, 50V", DC Resistance max.=0.8Ohm, Insulation Test Voltage=125VAC, Manufacturer="Wurth Elektronik", Operating Temperature="-40 to +125degC", Rated Current=0.26A, Rated Voltage=50V, ComponentLink1Description=Manufacturer, ComponentLink1URL=http://www.we-online.de, ComponentLink2Description=Datasheet, ComponentLink2URL=https://www.we-online.com/catalog/datasheet/744232601.pdf, Impedance=600Ohm, Impedance Test Condition=100MHz, Manufacturer Part Number=744232601, Mounting Technology=SMT, Packaging="Tape and Reel", Published Date="April 2020", Size=1206, Winding Style=bifiliar
L4 L5 L6 L7 L8: library part IND0402_MURATA_BLM15HD601SN1, Case=0402, Manufacturer=MURATA, Manufacturer Part Number=BLM15HD601SN1D, Power=300mA, Resistance=0.85R, Tolerance=±25%, Author="CERN DEM JLC", Component Type=Standard, ComponentHeight=0.55mm, CreateDate=28.02.2012, HelpURL=\\cern.ch\dfs\Applications\Altium\Datasheets\IND0402_MURATA_BLM15H.pdf, LatestRevisionDate=25.10.2018, Mounted=Yes, Part Description="SMD EMIFIL Suppression Chip Ferrite Bead", Part Number=IND0402_MURATA_BLM15HD601SN1, Pin Count=2, Sense=No, SMD=Yes, Socket=No, Status=None
LD1: library part LED_LITEON_LTST-C193KGKT-5A, "LED Green 1C 2A", Case=0603, Manufacturer="LITE-ON SEMICONDUCTOR", Manufacturer Part Number=LTST-C193KGKT-5A, Author="CERN DEM BC", Bonding=No, Color=Green, Component Type=Standard, ComponentHeight=0.35mm, CreateDate=11.11.2020, HelpURL=\\cern.ch\dfs\Applications\Altium\Datasheets\LED_LITEON_LTST-C193KGKT-5A.pdf, LatestRevisionDate=11.11.2020, Mounted=Yes, PackageDescription="SMD AlInGaP Green LED, Lens Water Clear, 2-Leads, Body 1.6x0.8mm", Part Description="Extra Thin SMD Chip LED, Ultra Bright AlInGaP Green, Lens Water Clear", Part Number=LED_LITEON_LTST-C193KGKT-5A, Pin Count=2, PressFit=No, Sense=No, SMD=Yes, Socket=No
LD2 LD3: library part LED_LITEON_LTST-C193KRKT-5A, "LED Red 1C 2A", Case=0603, Manufacturer="LITE-ON SEMICONDUCTOR", Manufacturer Part Number=LTST-C193KRKT-5A, Author="CERN DEM JMW", Bonding=No, Color=Red, Component Type=Standard, ComponentHeight=0.35mm, CreateDate=10.08.2020, HelpURL=\\cern.ch\dfs\Applications\Altium\Datasheets\LED_LITEON_LTST-C193KRKT-5A.pdf, LatestRevisionDate=10.08.2020, Mounted=Yes, PackageDescription="SMD AlInGaP Red LED, Lens Water Clear, 2-Leads, Body 1.6x0.8mm", Part Description="Extra Thin SMD Chip LED, Ultra Bright AlInGaP Red, Lens Water Clear", Part Number=LED_LITEON_LTST-C193KRKT-5A, Pin Count=2, PressFit=No, Sense=No, SMD=Yes, Socket=No
R1: library part R0402_49R9_1%_0.0625W_100PPM, "Resistor - 1%", Case=0402, Manufacturer=GENERIC, Manufacturer1 ComponentHeight=0.4mm, Manufacturer1 Example="YAGEO PHYCOMP", Manufacturer1 Part Number="232270674999L or RC0402FR-0749R9L", Power=0.0625W, Tolerance=±1%, Author="CERN DEM JLC", Component Type=Standard, CreateDate=24.10.2012, HelpURL=\\cern.ch\dfs\Applications\Altium\Datasheets\R0402_Phycomp_RC0402.pdf, LatestRevisionDate=24.10.2012, Manufacturer Part Number=R0402_49R9_1%_0.0625W_100PPM, Mounted=Yes, Part Description="General Purpose Thick Film Chip Resistor", Part Number=R0402_49R9_1%_0.0625W_100PPM, Pin Count=2, PressFit=No, Sense=No, SMD=Yes, Socket=No, Status="Not Recommended", TC=±100ppm/°C
R2 R5 R8 R16: library part R0402_4K7_1%_0.0625W_100PPM, "Resistor - 1%", Case=0402, Manufacturer=GENERIC, Manufacturer1 ComponentHeight=0.4mm, Manufacturer1 Example="YAGEO PHYCOMP", Manufacturer1 Part Number=232270674702L, Power=0.0625W, Tolerance=±1%, Author="CERN DEM JLC", Component Type=Standard, CreateDate=03.12.2007, HelpURL=\\cern.ch\dfs\Applications\Altium\Datasheets\R0402_Phycomp_RC0402.pdf, LatestRevisionDate=17.10.2012, Manufacturer Part Number=R0402_4K7_1%_0.0625W_100PPM, Mounted=Yes, Part Description="General Purpose Thick Film Chip Resistor", Part Number=R0402_4K7_1%_0.0625W_100PPM, Pin Count=2, PressFit=No, Sense=No, SMD=Yes, Socket=No, Status="Not Recommended", TC=±100ppm/°C
R3 R4: library part R0402_5K1_1%_0.0625W_100PPM, "Resistor - 1%", Case=0402, Manufacturer=GENERIC, Manufacturer1 ComponentHeight=0.4mm, Manufacturer1 Example="YAGEO PHYCOMP", Manufacturer1 Part Number=232270675102L, Power=0.0625W, Tolerance=±1%, Author="CERN DEM JLC", Component Type=Standard, CreateDate=03.12.2007, HelpURL=\\cern.ch\dfs\Applications\Altium\Datasheets\R0402_Phycomp_RC0402.pdf, LatestRevisionDate=17.10.2012, Manufacturer Part Number=R0402_5K1_1%_0.0625W_100PPM, Mounted=Yes, Part Description="General Purpose Thick Film Chip Resistor", Part Number=R0402_5K1_1%_0.0625W_100PPM, Pin Count=2, PressFit=No, Sense=No, SMD=Yes, Socket=No, Status="Not Recommended", TC=±100ppm/°C
R6 R7: library part R0402_140R_1%_0.0625W_100PPM, "Resistor - 1%", Case=0402, Manufacturer=GENERIC, Manufacturer1 ComponentHeight=0.4mm, Manufacturer1 Example="YAGEO PHYCOMP", Manufacturer1 Part Number="232270671401L or RC0402FR-07140RL", Power=0.0625W, Tolerance=±1%, Author="CERN DEM BC", Component Type=Standard, CreateDate=29.07.2015, HelpURL=\\cern.ch\dfs\Applications\Altium\Datasheets\R0402_Phycomp_RC0402.pdf, LatestRevisionDate=29.07.2015, Manufacturer Part Number=R0402_140R_1%_0.0625W_100PPM, Mounted=Yes, Part Description="General Purpose Thick Film Chip Resistor", Part Number=R0402_140R_1%_0.0625W_100PPM, Pin Count=2, PressFit=No, Sense=No, SMD=Yes, Socket=No, Status="Not Recommended", TC=±100ppm/°C
R9: library part R0402_3K_1%_0.0625W_100PPM, "Resistor - 1%", Case=0402, Manufacturer=GENERIC, Manufacturer1 ComponentHeight=0.4mm, Manufacturer1 Example="YAGEO PHYCOMP", Manufacturer1 Part Number=232270673002L, Power=0.0625W, Tolerance=±1%, Author="CERN DEM JLC", Component Type=Standard, CreateDate=03.12.2007, HelpURL=\\cern.ch\dfs\Applications\Altium\Datasheets\R0402_Phycomp_RC0402.pdf, LatestRevisionDate=17.10.2012, Manufacturer Part Number=R0402_3K_1%_0.0625W_100PPM, Mounted=Yes, Part Description="General Purpose Thick Film Chip Resistor", Part Number=R0402_3K_1%_0.0625W_100PPM, Pin Count=2, PressFit=No, Sense=No, SMD=Yes, Socket=No, Status="Not Recommended", TC=±100ppm/°C
R10 R12 R13 R15: library part R0402_49R9_0.1%_0.063W_25PPM, "Resistor - 0.1%", Case=0402, Manufacturer=GENERIC, Manufacturer1 ComponentHeight=0.35mm, Manufacturer1 Example="TE CONNECTIVITY", Manufacturer1 Part Number=CPF0402B49R9E1, Power=0.063W, Tolerance=±0.1%, Author="CERN DEM JMW", Component Type=Standard, CreateDate=22.09.2015, HelpURL=\\cern.ch\dfs\Applications\Altium\Datasheets\R0402_TYCO_CPF.pdf, LatestRevisionDate=22.09.2015, Manufacturer Part Number=R0402_49R9_0.1%_0.063W_25PPM, Mounted=Yes, Part Description="Thin Film Precision Resistor", Part Number=R0402_49R9_0.1%_0.063W_25PPM, Pin Count=2, PressFit=No, Sense=No, SMD=Yes, Socket=No, Status="Not Recommended", TC=±25ppm/°C
R11 R14: library part R0402_75R_1%_0.0625W_100PPM, "Resistor - 1%", Case=0402, Manufacturer=GENERIC, Manufacturer1 ComponentHeight=0.4mm, Manufacturer1 Example="YAGEO PHYCOMP", Manufacturer1 Part Number=232270677509L, Power=0.0625W, Tolerance=±1%, Author="CERN DEM JLC", Component Type=Standard, CreateDate=03.12.2007, HelpURL=\\cern.ch\dfs\Applications\Altium\Datasheets\R0402_Phycomp_RC0402.pdf, LatestRevisionDate=17.10.2012, Manufacturer Part Number=R0402_75R_1%_0.0625W_100PPM, Mounted=Yes, Part Description="General Purpose Thick Film Chip Resistor", Part Number=R0402_75R_1%_0.0625W_100PPM, Pin Count=2, PressFit=No, Sense=No, SMD=Yes, Socket=No, Status="Not Recommended", TC=±100ppm/°C
R17 R18 R19: library part R0402_100K_1%_0.0625W_100PPM, "Resistor - 1%", Case=0402, Manufacturer=GENERIC, Manufacturer1 ComponentHeight=0.4mm, Manufacturer1 Example="YAGEO PHYCOMP", Manufacturer1 Part Number=232270671004L, Power=0.0625W, Tolerance=±1%, Author="CERN DEM JLC", Component Type=Standard, CreateDate=03.12.2007, HelpURL=\\cern.ch\dfs\Applications\Altium\Datasheets\R0402_Phycomp_RC0402.pdf, LatestRevisionDate=17.10.2012, Manufacturer Part Number=R0402_100K_1%_0.0625W_100PPM, Mounted=Yes, Part Description="General Purpose Thick Film Chip Resistor", Part Number=R0402_100K_1%_0.0625W_100PPM, Pin Count=2, PressFit=No, Sense=No, SMD=Yes, Socket=No, Status="Not Recommended", TC=±100ppm/°C
T1 T2: "WE-STST SMT Super Tiny Signal Transformer, size 4532, 1:1, 350uH", Inductance=350uH, Insulation Test Voltage=1500Vrms, Manufacturer="Wurth Elektronik", Operating Temperature="-40 to +105degC", Applications="Ethernet, Single Pair Ethernet", ComponentLink1Description=Manufacturer, ComponentLink1URL=http://www.we-online.de, ComponentLink2Description=Datasheet, ComponentLink2URL=https://www.we-online.com/catalog/datasheet/74930000.pdf, Data Rate="10/100/1GBase-T, 10/100Base-T1", Manufacturer Part Number=74930000, Mounting Technology=SMT, Packaging="Tape and Reel", Published Date="January 2021", Size=4532, Turns Ratio=1:1